# Altium PCB WPU171C.PcbDoc
Units mm, origin at the board's own origin, x right, y up, seen from the top; angles counter-clockwise.
Board outline 32 x 46 mm, 2 copper layers (Top Layer, Bottom Layer); 100 components, 78 nets, 376 pads, 128 vias.
Unrouted connection lines stored in the file: 10.
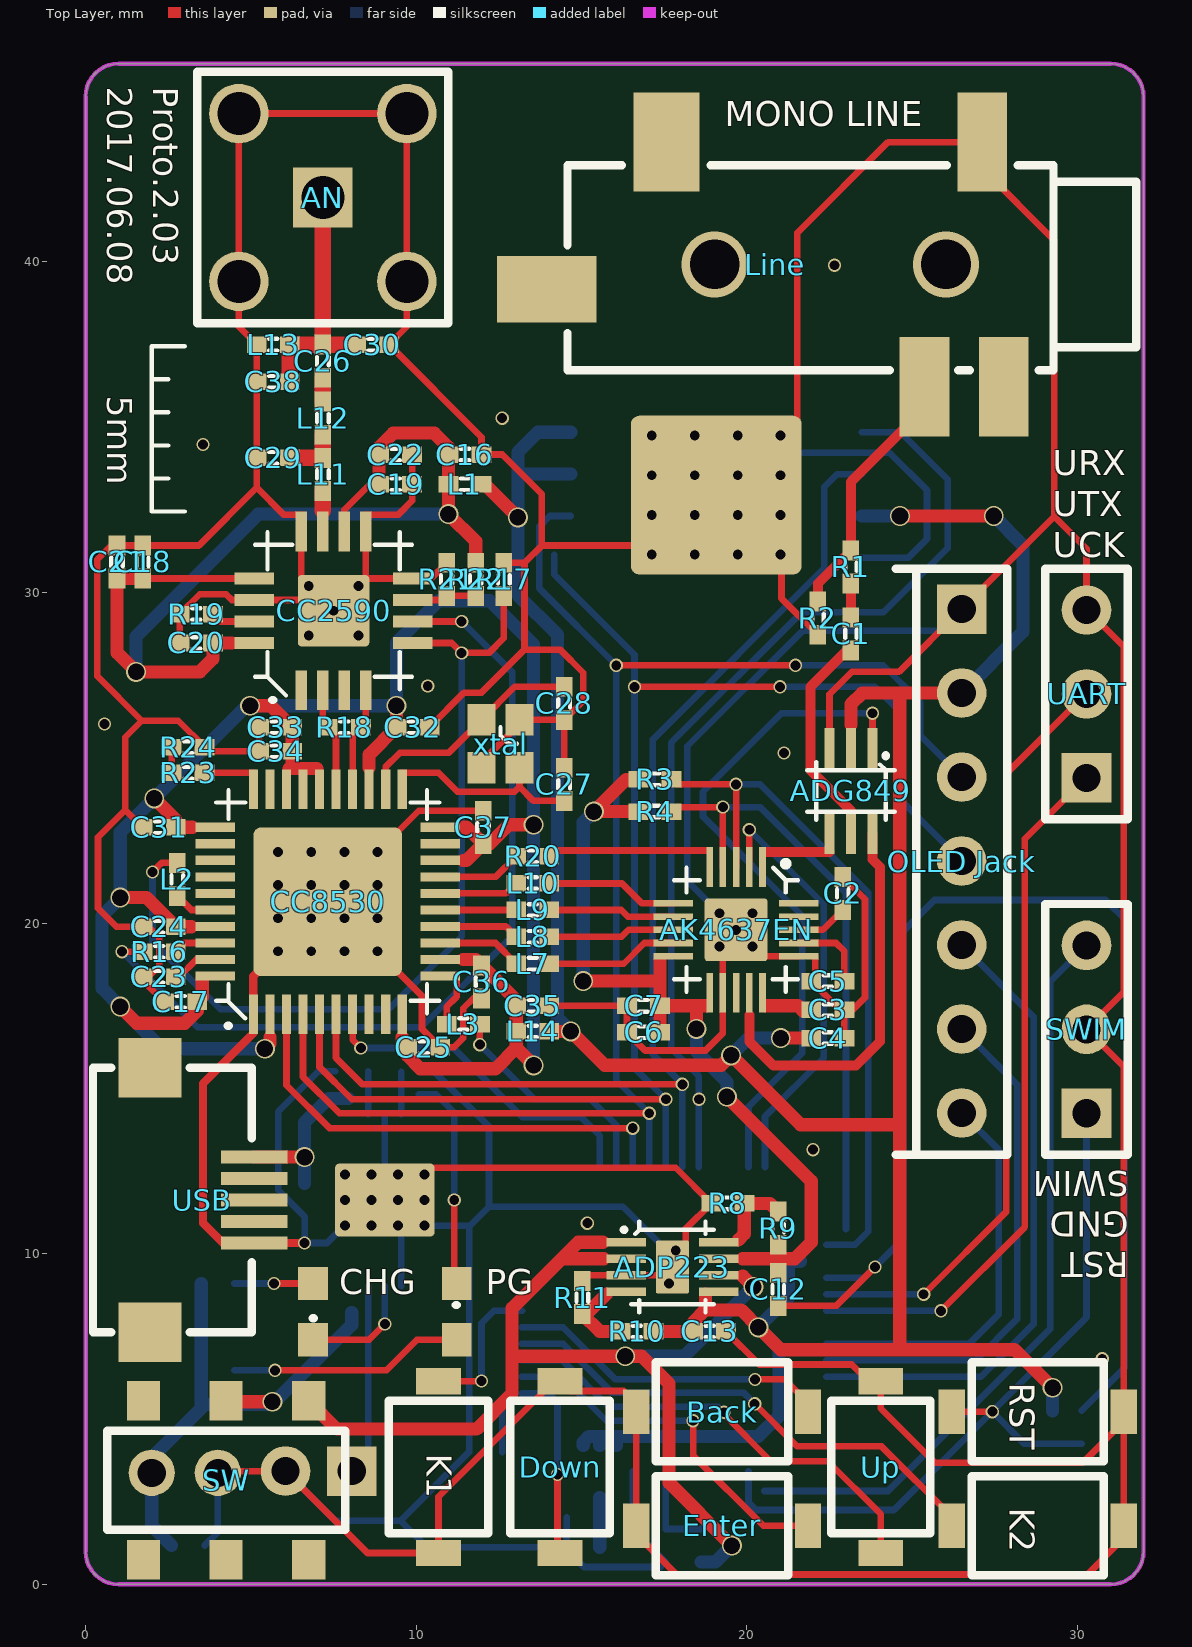
[diagram p0: Top Layer view]
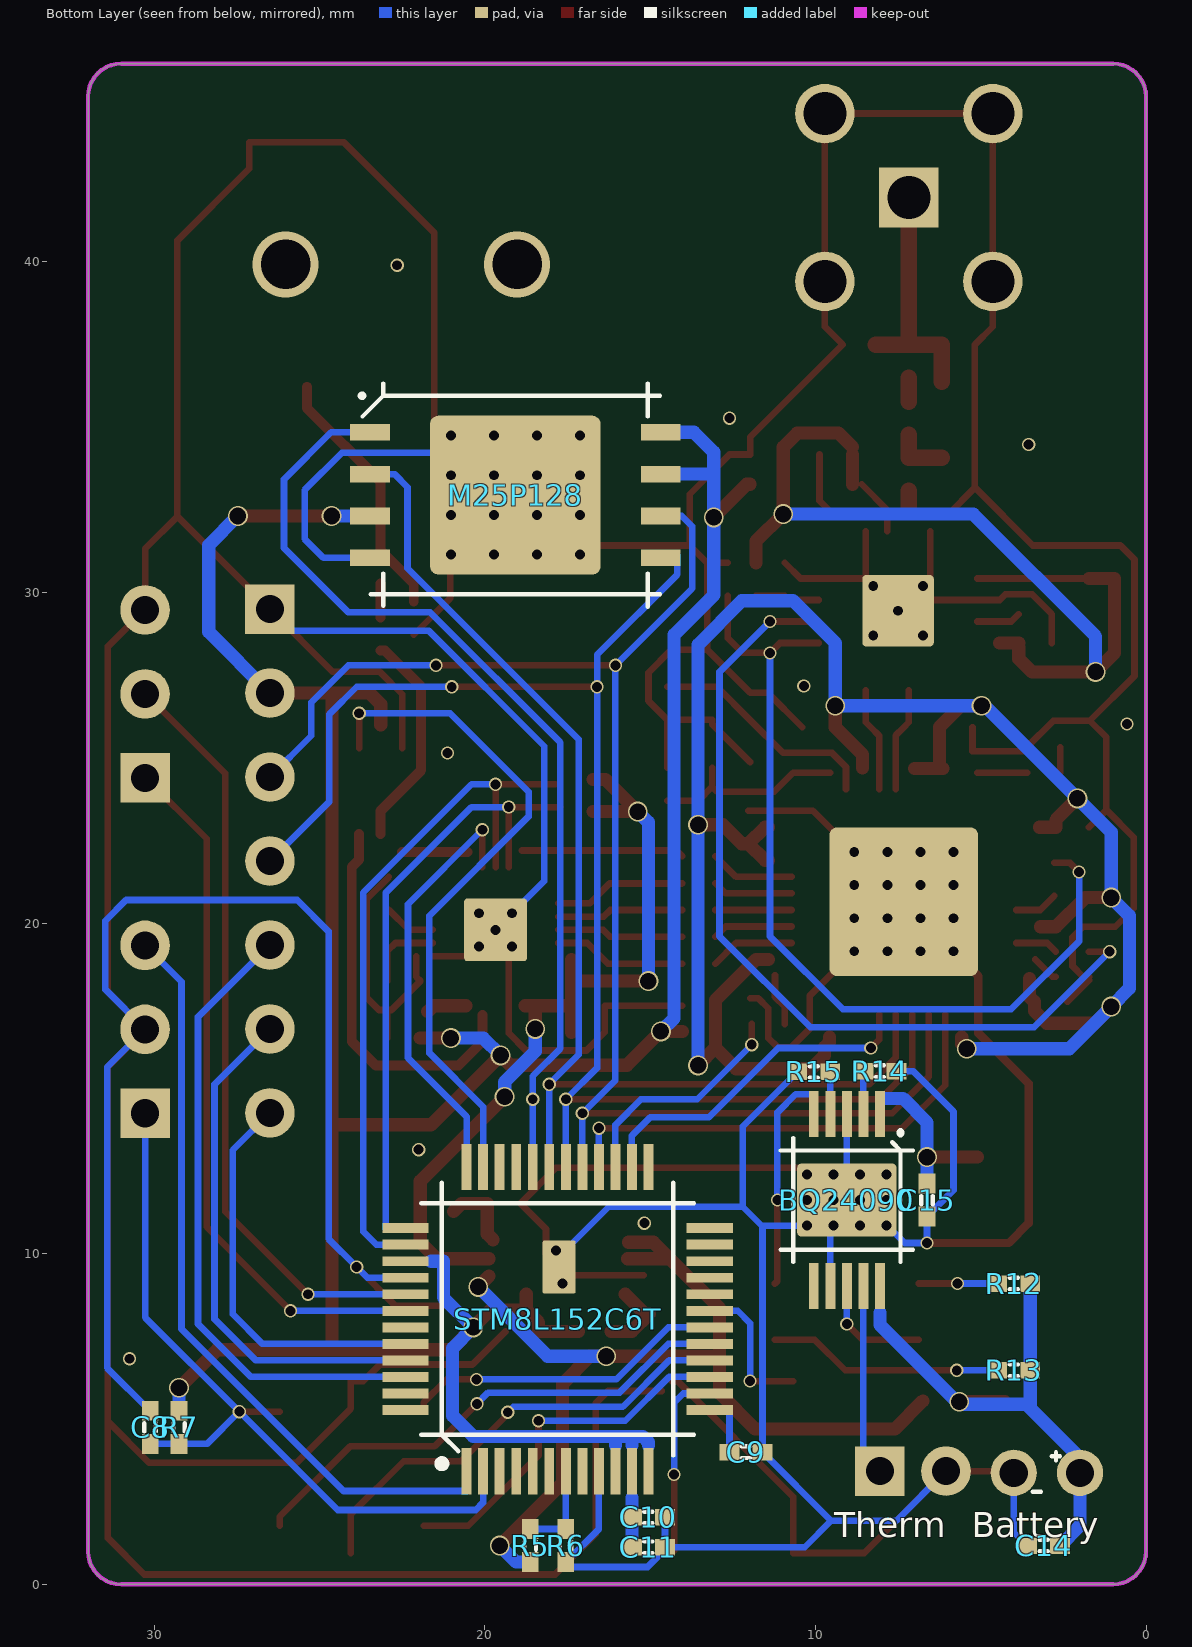
[diagram p1: Bottom Layer view, seen from below]

## Layer stack, top to bottom
Top Solder: solder mask 0.0102, Solder Resist, Dk 3.5
Top Layer: signal copper 0.0356
Dielectric 1: dielectric 0.32, FR-4, Dk 4.8
Bottom Layer: signal copper 0.0356
Bottom Solder: solder mask 0.0102, Solder Resist, Dk 3.5

## Board outline
0,1 ccw(c1,1) 1,0 31,0 ccw(c31,1) 32,1 32,45 ccw(c31,45) 31,46 1,46 ccw(c1,45) 0,45

## Design rules (kind name [scope] priority, off if disabled: settings)
Clearance [All] p1: gap=0.05
ComponentClearance [All] p1: gap=-1 collisioncheckmode=3 verticalgap=0.254 showdistances=FALSE
HoleToHoleClearance [All] p1: gap=0.01 allowstackedmicrovias=TRUE
MinimumSolderMaskSliver [All] p1: minsoldermaskwidth=0.01
PolygonConnect [All] p1: connectstyle=Relief reliefconductorwidth=0.254 reliefentries=4 polygonreliefangle="90 Angle" airgapwidth=0.254
RoutingVias [All] p1: holewidth=0.3 width=0.4 viastyle="Through Hole" minholewidth=0.3 minwidth=0.4 maxholewidth=5 maxwidth=6
SilkToSilkClearance [All] p1: silktosilkclearance=0
SilkToSolderMaskClearance [IsPad] p1: minsilkscreentomaskgap=0 clearancetoexposedcopper=TRUE
SolderMaskExpansion [All] p1: expansion=0.102
Width [All] p1: maxlimit=0.8 minlimit=0.1 preferedwidth=0.2
25 further rules are at their usual default settings.

## Classes and differential pairs
component class Audio: ADG849 AK4637EN C1 C2 C3 C4 C5 C6 C7 Line R1 R2 R3 R4
component class MCU: ADP223 Back Battery BQ24090 C8 C9 C10 C11 C12 C13 C14 C15 CHG Down Enter K1 K2 M25P128 "OLED Jack" PG R5 R6 R7 R8 R9 R10 R11 R12 R13 R14 R15 RST STM8L152C6T SW SWIM Therm UART Up USB
component class RF: AN C16 C17 C18 C19 C20 C21 C22 C23 C24 C25 C26 C27 C28 C29 C30 C31 C32 C33 C34 C35 C36 C37 C38 CC2590 CC8530 L1 L2 L3 L7 L8 L9 L10 L11 L12 L13 L14 R16 R17 R18 R19 R20 R21 R22 R23 R24 X1 xtal

## Components (designator, comment, footprint, x,y, rotation, side; value= is the part's Value field where it differs from the comment)
ADG849 "ADG849" ADG849 23.15,24 r180 top
ADP223 "ADP223" ADP223 17.75,9.6 r270 top
AK4637EN "AK4637EN" AK4637EN 19.675,19.8 r180 top
AN "Antenna SMA" "Antenna SMA-KE" 7.175,41.95 r0 top (schematic designator AN1)
Back "Button" Button_3x4 19.25,5.225 r180 top
Battery "Battery Pack" "Battery Jack small" 3,3.375 r0 bottom
BQ24090 "BQ24090" BQ24090 9.05,11.625 r0 bottom
C1 "Capacity SMD" "SMD 0402_silk" 23.15,28.75 r90 top
C2 "Capacity SMD" "SMD 0402_silk" 22.9,20.9 r90 top
C3 "Capacity SMD" "SMD 0402_silk" 22.45,17.375 r0 top
C4 "Capacity SMD" "SMD 0402_silk" 22.45,16.525 r0 top
C5 "Capacity SMD" "SMD 0402_silk" 22.45,18.25 r180 top
C6 "Capacity SMD" "SMD 0402_silk" 16.875,16.7 r180 top
C7 "Capacity SMD" "SMD 0402_silk" 16.875,17.5 r180 top
C8 "Capacity SMD" "SMD 0402_silk" 30.125,4.75 r270 bottom
C9 "Capacity SMD" "SMD 0402_silk" 12.1,4 r0 bottom
C10 "Capacity SMD" "SMD 0402_silk" 15.05,2.025 r0 bottom
C11 "Capacity SMD" "SMD 0402_silk" 15.05,1.125 r0 bottom
C12 "Capacity SMD" "SMD 0402_silk" 20.95,8.925 r270 top
C13 "Capacity SMD" "SMD 0402_silk" 18.875,7.65 r180 top
C14 "Capacity SMD" "SMD 0402_silk" 3.1,1.175 r180 bottom
C15 "Capacity SMD" "SMD 0402_silk" 6.625,11.625 r90 bottom
C16 "Capacity SMD" "SMD 0402_silk" 11.475,34.175 r180 top
C17 "Capacity SMD" "SMD 0402_silk" 2.875,17.625 r180 top
C18 "Capacity SMD" "SMD 0402_silk" 1.725,30.925 r270 top
C19 "Capacity SMD" "SMD 0402_silk" 9.375,33.275 r180 top
C20 "Capacity SMD" "SMD 0402_silk" 3.35,28.475 r0 top
C21 "Capacity SMD" "SMD 0402_silk" 0.95,30.925 r270 top
C22 "Capacity SMD" "SMD 0402_silk" 9.375,34.175 r180 top
C23 "Capacity SMD" "SMD 0402_silk" 2.225,18.381 r180 top
C24 "Capacity SMD" "SMD 0402_silk" 2.225,19.894 r0 top
C25 "Capacity SMD" "SMD 0402_silk" 10.225,16.25 r180 top
C26 "Capacity SMD" "SMD 0402_silk" 7.175,37 r90 top
C27 "Capacity SMD" "SMD 0402_silk" 14.475,24.2 r270 top
C28 "Capacity SMD" "SMD 0402_silk" 14.475,26.65 r90 top
C29 "Capacity SMD" "SMD 0402_silk" 5.675,34.075 r0 top
C30 "Capacity SMD" "SMD 0402_silk" 8.675,37.5 r180 top
C31 "Capacity SMD" "SMD 0402_silk" 2.225,22.9 r0 top
C32 "Capacity SMD" "SMD 0402_silk" 9.9,25.925 r180 top
C33 "Capacity SMD" "SMD 0402_silk" 5.75,25.925 r0 top
C34 "Capacity SMD" "SMD 0402_silk" 5.75,25.2 r0 top
C35 "Capacity SMD" "SMD 0402_silk" 13.525,17.5 r180 top
C36 "Capacity SMD" "SMD 0402_silk" 11.975,18.225 r90 top
C37 "Capacity SMD" "SMD 0402_silk" 12.025,22.9 r270 top
C38 "Capacity SMD" "SMD 0402_silk" 5.675,36.375 r0 top
CC2590 "CC2590" CC2590 7.5,29.45 r90 top
CC8530 "CC8530" CC8530 7.325,20.65 r90 top
CHG "LED" LED_0603 6.875,8.25 r270 top
Down "Button" Button_3x4 14.35,3.55 r90 top
Enter "Button" Button_3x4 19.25,1.775 r180 top
K1 "Button" Button_3x4 10.675,3.55 r270 top
K2 "Button" Button_3x4 28.8,1.775 r0 top
L1 "Inductor SMD" "SMD 0402_silk" 11.475,33.275 r180 top
L2 "Inductor SMD" "SMD 0402_silk" 2.775,21.325 r90 top
L3 "Inductor SMD" "SMD 0402_silk" 11.425,16.95 r0 top
L7 "Inductor SMD" "SMD 0402_silk" 13.525,18.775 r180 top
L8 "Inductor SMD" "SMD 0402_silk" 13.525,19.587 r180 top
L9 "Inductor SMD" "SMD 0402_silk" 13.525,20.4 r180 top
L10 "Inductor SMD" "SMD 0402_silk" 13.525,21.213 r180 top
L11 "Inductor SMD" "SMD 0402_silk" 7.175,33.575 r270 top
L12 "Inductor SMD" "SMD 0402_silk" 7.175,35.275 r90 top
L13 "Inductor SMD" "SMD 0402_silk" 5.675,37.5 r0 top
L14 "Inductor SMD" "SMD 0402_silk" 13.525,16.725 r180 top
Line "Audio Jack" "Audio Jack PJ-328" 29.275,39.925 r180 top
M25P128 "M25P128" M25P128 19.075,32.95 r180 bottom
"OLED Jack" "OLED Jack" "OLED Jack" 26.5,29.5 r0 top
PG "LED" LED_0603 11.225,8.25 r90 top
R1 "Resistor SMD" "SMD 0402_silk" 23.15,30.775 r90 top
R2 "Resistor SMD" "SMD 0402_silk" 22.15,29.225 r90 top
R3 "Resistor SMD" "SMD 0402_silk" 17.225,24.35 r180 top
R4 "Resistor SMD" "SMD 0402_silk" 17.225,23.375 r180 top
R5 "Resistor SMD" "SMD 0402_silk" 18.625,1.175 r270 bottom
R6 "Resistor SMD" "SMD 0402_silk" 17.55,1.175 r90 bottom
R7 "Resistor SMD" "SMD 0402_silk" 29.25,4.75 r90 bottom
R8 "Resistor SMD" "SMD 0402_silk" 19.425,11.525 r180 top
R9 "Resistor SMD" "SMD 0402_silk" 20.95,10.775 r90 top
R10 "Resistor SMD" "SMD 0402_silk" 16.675,7.65 r0 top
R11 "Resistor SMD" "SMD 0402_silk" 15.025,8.675 r90 top
R12 "Resistor SMD" "SMD 0402_silk" 4,9.1 r180 bottom
R13 "Resistor SMD" "SMD 0402_silk" 4,6.475 r180 bottom
R14 "Resistor SMD" "SMD 0402_silk" 8.05,15.525 r0 bottom
R15 "Resistor SMD" "SMD 0402_silk" 10.05,15.5 r180 bottom
R16 "Resistor SMD" "SMD 0402_silk" 2.225,19.137 r180 top
R17 "Resistor SMD" "SMD 0402_silk" 12.65,30.4 r270 top
R18 "Resistor SMD" "SMD 0402_silk" 7.825,25.925 r180 top
R19 "Resistor SMD" "SMD 0402_silk" 3.35,29.35 r180 top
R20 "Resistor SMD" "SMD 0402_silk" 13.525,22.025 r180 top
R21 "Resistor SMD" "SMD 0402_silk" 10.925,30.4 r270 top
R22 "Resistor SMD" "SMD 0402_silk" 11.8,30.4 r270 top
R23 "Resistor SMD" "SMD 0402_silk" 3.1,24.55 r0 top
R24 "Resistor SMD" "SMD 0402_silk" 3.1,25.325 r180 top
RST "Button" Button_3x4 28.8,5.225 r180 top
STM8L152C6T "STM8L152C6T" "STM LQFP48" 17.8,8.025 r180 bottom (schematic designator STM1)
SW "Switch" "Switch 2P2T" 4.25,3.15 r0 top
SWIM "Header_3x1" HEADER_3x1_2.54 30.275,14.25 r90 top
Therm "Thermistor" Header_2x1_2.00 7.05,3.425 r180 bottom
UART "Header_3x1" HEADER_3x1_2.54 30.275,24.395 r90 top
Up "Button" Button_3x4 24.05,3.55 r90 top
USB "USB Jack Mirco-B" "USB Micro-B" 4.775,11.625 r270 top
xtal "XTAL" xtal_3225_FA-128 12.55,25.425 r90 top

## Footprints (in the part's own frame and the unit in brackets; to place one, negate y for a bottom-side part, rotate by r counter-clockwise, add the part's x,y. Pads: shape width x height; smd on the part's side, far side on the other; paste and mask are expansions set on the pad)
ADG849 [mm]
  rect 0.3x1.2 smd paste+0 mask+0: 1(-0.65,-1.3) 2(0,-1.3) 3(0.65,-1.3) 4(0.65,1.3) 5(0,1.3) 6(-0.65,1.3)
  silkscreen extent -1.33,-1.07 1.33,0.87
ADP223 [mm]
  rect 0.25x1.2 smd mask+0: 1(-0.75,-1.4) 2(-0.25,-1.4) 3(0.25,-1.4) 4(0.75,-1.4) 5(0.75,1.4) 6(0.25,1.4) 7(-0.25,1.4) 8(-0.75,1.4)
  rrect10% 1.6x1 smd mask+0: 3(0,0)
  rrect10% 1.6x1 smd far side mask+0: 3(0,0)
  silkscreen extent -1.38,-1.48 1.38,1.25
AK4637EN [mm]
  rect 0.2x1.2 smd mask+0: 1(-0.8,-1.9) 2(-0.4,-1.9) 3(0,-1.9) 4(0.4,-1.9) 5(0.8,-1.9) 11(0.8,1.9) 12(0.4,1.9) 13(0,1.9) 14(-0.4,1.9) 15(-0.8,1.9)
  rect 1.2x0.2 smd mask+0: 6(1.9,-0.8) 7(1.9,-0.4) 8(1.9,0) 9(1.9,0.4) 10(1.9,0.8) 16(-1.9,0.8) 17(-1.9,0.4) 18(-1.9,0) 19(-1.9,-0.4) 20(-1.9,-0.8)
  rrect10% 1.9x1.9 smd mask+0: 12(0,0)
  rrect10% 1.9x1.9 smd far side mask+0: 12(0,0)
  silkscreen extent -1.88,-2.05 1.88,1.88
"Antenna SMA-KE" [mm]
  rect 1.8x1.8 hole 1.3 paste+0 mask+0: 1(0,0)
  round 1.8 hole 1.3 paste+0 mask+0: 2(-2.54,-2.54) 2(-2.54,2.54) 2(2.54,-2.54) 2(2.54,2.54)
  silkscreen extent -3.8,-3.8 3.8,3.8
"Audio Jack PJ-328" [mm]
  rect 1.5x3 smd mask+0.1: 1(2.15,-3.7) 3(3.9,3.7) 5(1.5,3.7)
  rect 2x3 smd mask+0.1: 2(11.7,-3.7)
  rect 3x2 smd mask+0.1: 4(15.325,0.75)
  silkscreen extent -2.5,-3 14.7,3.2
"Battery Jack small" [mm]
  round 1.4 hole 0.85 paste+0 mask+0: 1(-1,0) 2(1,0)
  silkscreen extent -0.4,-0.63 0.43,0.58
BQ24090 [mm]
  rect 0.3x1.4 smd paste+0 mask+0: 1(-1,-2.6) 2(-0.5,-2.6) 3(0,-2.6) 4(0.5,-2.6) 5(1,-2.6) 6(1,2.6) 7(0.5,2.6) 8(0,2.6) 9(-0.5,2.6) 10(-1,2.6)
  rrect10% 3x2.2 smd far side paste+0 mask+0: 3(0,0)
  rrect10% 3x2.2 smd paste+0 mask+0: 3(0,0)
  silkscreen extent -2,-2.05 2,1.88
Button_3x4 [mm]
  rect 0.8x1.35 smd paste+0 mask+0: 1(-2.6,0) 2(2.6,0)
  silkscreen extent -2,-1.5 2,1.5
CC2590 [mm]
  rect 1.2x0.35 smd paste+0 mask+0: 1(-2.4,0.975) 2(-2.4,0.325) 3(-2.4,-0.325) 4(-2.4,-0.975) 9(2.4,-0.975) 10(2.4,-0.325) 11(2.4,0.325) 12(2.4,0.975)
  rect 0.35x1.2 smd paste+0 mask+0: 5(-0.975,-2.4) 6(-0.325,-2.4) 7(0.325,-2.4) 8(0.975,-2.4) 13(0.975,2.4) 14(0.325,2.4) 15(-0.325,2.4) 16(-0.975,2.4)
  rrect10% 2.16x2.16 smd paste+0 mask+0: 17(0,0)
  rrect10% 2.16x2.16 smd far side paste+0 mask+0: 17(0,0)
  silkscreen extent -2.7,-2.37 2.37,2.37
CC8530 [mm]
  rect 1.2x0.28 smd paste+0 mask+0: 1(-3.4,2.25) 2(-3.4,1.75) 3(-3.4,1.25) 4(-3.4,0.75) 5(-3.4,0.25) 6(-3.4,-0.25) 7(-3.4,-0.75) 8(-3.4,-1.25) 9(-3.4,-1.75) 10(-3.4,-2.25) 21(3.4,-2.25) 22(3.4,-1.75) 23(3.4,-1.25) 24(3.4,-0.75) 25(3.4,-0.25) 26(3.4,0.25) 27(3.4,0.75) 28(3.4,1.25) 29(3.4,1.75) 30(3.4,2.25)
  rect 0.28x1.2 smd paste+0 mask+0: 11(-2.25,-3.4) 12(-1.75,-3.4) 13(-1.25,-3.4) 14(-0.75,-3.4) 15(-0.25,-3.4) 16(0.25,-3.4) 17(0.75,-3.4) 18(1.25,-3.4) 19(1.75,-3.4) 20(2.25,-3.4) 31(2.25,3.4) 32(1.75,3.4) 33(1.25,3.4) 34(0.75,3.4) 35(0.25,3.4) 36(-0.25,3.4) 37(-0.75,3.4) 38(-1.25,3.4) 39(-1.75,3.4) 40(-2.25,3.4)
  rrect10% 4.5x4.5 smd paste+0 mask+0: 41(0,0)
  rrect10% 4.5x4.5 smd far side paste+0 mask+0: 41(0,0)
  silkscreen extent -3.75,-3.37 3.37,3.37
Header_2x1_2.00 [mm]
  rect 1.5x1.5 hole 0.85 paste+0 mask+0: 1(-1,0)
  round 1.5 hole 0.85 paste+0 mask+0: 2(1,0)
HEADER_3x1_2.54 [mm]
  rect 1.5x1.5 hole 0.85 paste+0 mask+0: 1(0,0)
  round 1.5 hole 0.85 paste+0 mask+0: 2(2.54,0) 3(5.08,0)
  silkscreen extent -1.25,-1.25 6.33,1.25
LED_0603 [mm]
  rect 1x0.9 smd paste+0 mask+0: 1(-0.85,0)
  rect 1x0.9 smd mask+0: 2(0.85,0)
  silkscreen extent 0.2,0 0.2,0.03
M25P128 [mm]
  rect 1.2x0.5 smd paste+0 mask+0: 1(-4.4,1.9) 2(-4.4,0.633) 3(-4.4,-0.633) 4(-4.4,-1.9) 5(4.4,-1.9) 6(4.4,-0.633) 7(4.4,0.633) 8(4.4,1.9)
  rrect10% 5.16x4.8 smd far side paste+0 mask+0: 4(0,0)
  rrect10% 5.16x4.8 smd paste+0 mask+0: 4(0,0)
  silkscreen extent -4.65,-3.37 4.38,3.37
"OLED Jack" [mm]
  rect 1.5x1.5 hole 0.85 paste+0 mask+0: 1(0,0)
  round 1.5 hole 0.85 paste+0 mask+0: 2(0,-2.54) 3(0,-5.08) 4(0,-7.62) 5(0,-10.16) 6(0,-12.7) 7(0,-15.24)
  silkscreen extent -2,-16.5 1.38,1.22
"SMD 0402_silk" [mm]
  rect 0.6x0.5 smd paste+0 mask+0: 1(-0.5,0) 2(0.5,0)
  silkscreen extent -0.13,-0.18 0.13,0.18
"STM LQFP48" [mm] "48-Pin LQFP"
  rect 0.3x1.4 smd paste+0 mask+0: 1(-2.75,-4.6) 2(-2.25,-4.6) 3(-1.75,-4.6) 4(-1.25,-4.6) 5(-0.75,-4.6) 6(-0.25,-4.6) 7(0.25,-4.6) 8(0.75,-4.6) 9(1.25,-4.6) 10(1.75,-4.6) 11(2.25,-4.6) 12(2.75,-4.6) 25(2.75,4.6) 26(2.25,4.6) 27(1.75,4.6) 28(1.25,4.6) 29(0.75,4.6) 30(0.25,4.6) 31(-0.25,4.6) 32(-0.75,4.6) 33(-1.25,4.6) 34(-1.75,4.6) 35(-2.25,4.6) 36(-2.75,4.6)
  rect 1.4x0.3 smd paste+0 mask+0: 13(4.6,-2.75) 14(4.6,-2.25) 15(4.6,-1.75) 16(4.6,-1.25) 17(4.6,-0.75) 18(4.6,-0.25) 19(4.6,0.25) 20(4.6,0.75) 21(4.6,1.25) 22(4.6,1.75) 23(4.6,2.25) 24(4.6,2.75) 37(-4.6,2.75) 38(-4.6,2.25) 39(-4.6,1.75) 40(-4.6,1.25) 41(-4.6,0.75) 42(-4.6,0.25) 43(-4.6,-0.25) 44(-4.6,-0.75) 45(-4.6,-1.25) 46(-4.6,-1.75) 47(-4.6,-2.25) 48(-4.6,-2.75)
  silkscreen extent -4.13,-4.47 4.13,4.13
"Switch 2P2T" [mm]
  rect 1x1.2 smd: 1(-2.5,2.4) 3(2.5,2.4) 4(-2.5,-2.4) 5(0,-2.4) 6(2.5,-2.4)
  rect 1x1.2 smd mask+0.1: 2(0,2.4)
  silkscreen extent -3.6,-1.5 3.6,1.5
"USB Micro-B" [mm]
  rect 1.8x1.9 smd paste+0 mask+0: 0(-4,-2.825) 0(4,-2.825)
  rect 0.4x2 smd paste+0 mask+0: 1(-1.3,0.325) 2(-0.65,0.325) 3(0,0.325) 4(0.65,0.325) 5(1.3,0.325)
  silkscreen extent -4,-4.55 4,0.25
xtal_3225_FA-128 [mm]
  rect 0.95x0.85 smd paste+0 mask+0: 1(-0.725,-0.575) 2(0.725,-0.575) 3(0.725,0.575) 4(-0.725,0.575)
  silkscreen extent 0,-0.5 0.5,0

## Part data
Line: library part "Audio Jack PJ-328"
Therm: library part "Thermistor NTC"
USB: library part "USB Jack Micro-B"

## Via types
v1: diameter 0.4, hole 0.3, Top Layer to Bottom Layer, 99 vias
v2: diameter 0.6, hole 0.5, Top Layer to Bottom Layer, 27 vias
v3: diameter 2, hole 1.5, Top Layer to Bottom Layer, 2 vias

## Nets (pads, with @x,y where several pads share a name; then routed paths per layer and width w, separated by ;. In a path a pad name is that pad's centre, name@x,y a point inside that pad or via, vN(x,y) a via of type N, cw(c..) or ccw(c..) an arc to the next point about the centre after c; other vN are vias at no path point)
8530_CSN: CC8530.3 STM8L152C6T.28 | length 14.3
  Top Layer w0.2: CC8530.3 6.075,15.1 7.375,13.8 v1(16.55,13.8)
  Bottom Layer w0.2: STM8L152C6T.28 v1(16.55,13.8)
8530_MISO: CC8530.6 M25P128.2 STM8L152C6T.31 | length 36.5
  Top Layer w0.2: CC8530.6 7.575,15.925 8.375,15.125 v1(18.05,15.125)
  Bottom Layer w0.2: STM8L152C6T.31 v1(18.05,15.125) 18.05,15.133 17.158,16.025 17.158,25.558 22.337,30.737 22.337,33.188 22.733,33.583 M25P128.2
8530_MOSI: "OLED Jack.4" CC8530.5 M25P128.5 STM8L152C6T.30 | length 46
  Top Layer w0.2: CC8530.5 7.075,15.65 8.05,14.675 v1(17.55,14.675) ; v1(16.604,27.15) v1(21,27.15)
  Bottom Layer w0.2: M25P128.5@14.175,31.15 14.175,30.55 16.604,28.121 16.604,15.621 v1(17.55,14.675) STM8L152C6T.30 ; v1(21,27.15) 23.875,27.15 24.7,26.325 24.7,23.68 26.5,21.88
8530_RSTN: L3.2 STM8L152C6T.27 | length 7
  Top Layer w0.2: v1(11.925,16.325) L3.2
  Bottom Layer w0.2: v1(11.925,16.325) 13.575,14.675 15.275,14.675 16.05,13.9 STM8L152C6T.27
8530_SCLK: "OLED Jack.3" CC8530.4 M25P128.6 STM8L152C6T.29 | length 47.1
  Top Layer w0.2: CC8530.4 6.575,15.35 7.675,14.25 v1(17.05,14.25) ; v1(16.05,27.8) v1(21.475,27.8)
  Bottom Layer w0.2: M25P128.6 14.042,32.317 13.725,32 13.725,30.125 v1(16.05,27.8) 16.05,15.25 v1(17.05,14.25) STM8L152C6T.29 ; v1(21.475,27.8) 24.125,27.8 25.25,26.675 25.25,25.67 26.5,24.42
+1.8V: ADP223.7 AK4637EN.10 AK4637EN.11 C6.1 C7.1 C12.1 R3.2 R4.2 R9.1 | length 25.1
  Top Layer w0.4: v2(15.05,18.25) 17.325,18.25 ; R4.2 v2(15.375,23.375) 16.35,24.35 R3.2 ; C6.1 C7.1 ; AK4637EN.10@17.375,18.9 C7.1 ; v2(18.475,16.8) 18.475,17.5 ; AK4637EN.11@18.775,17.5 18.475,17.5 ; v2(19.4,14.75) 21.95,12.2 21.95,10.35 21.45,9.85 19.875,9.85 ; C7.1 18.475,17.5
  Bottom Layer w0.4: v2(15.05,18.25) 15.05,23.05 v2(15.375,23.375) ; v2(18.475,16.8) 18.475,16.125 19.4,15.2 v2(19.4,14.75)
+3.3V: "OLED Jack.2" ADG849.2 ADP223.5 AK4637EN.15 C3.1 C4.1 C10.2 C11.2 C13.2 L1.1 L14.1 M25P128.3 M25P128.7 M25P128.8 R7.2 R10.2 STM8L152C6T.10 STM8L152C6T.11 STM8L152C6T.12 STM8L152C6T.39 | length 102.2
  Top Layer w0.4: L1.1 12.075,33.275 v2(13.075,32.275) ; L14.1 v2(14.675,16.725) 15.7,15.7 19.225,15.7 v2(19.525,16) 21.625,13.9 24.625,13.9 ; R10.2 C13.2 18.375,7.925 18.75,8.3 ; ADP223.5@18.75,8.775 18.75,8.3 ; 20.575,17.5 21.55,17.5 C3.1@21.725,17.325 ; v2(21.025,16.525) C4.1 ; 23.15,26 23.15,26.625 23.485,26.96 24.625,26.96 ; 24.625,7.1 24.625,26.96 ; v2(24.633,32.317) v2(27.467,32.317) ; 26.5,26.96 24.625,26.96 ; v2(29.25,5.95) 28.1,7.1 21.025,7.1 v2(20.35,7.775) 19.825,8.3 18.75,8.3
  Bottom Layer w0.4: 13.092,33.583 M25P128.7 ; v2(14.675,16.725) 14.275,17.125 14.275,28.725 13.075,29.925 v2(13.075,32.275) 13.075,34.25 13.675,34.85 M25P128.8 ; 15.05,4.2 15.05,4.3 15.225,4.475 15.55,4.475 ; C11.2 C10.2 15.55,2.625 ; 15.55,4.2 15.55,4.475 ; 16.05,4.2 16.05,4.475 ; v2(19.525,16) 20.05,16.525 v2(21.025,16.525) ; 21.625,9.775 21.25,9.775 21.25,8.675 v2(20.35,7.775) 20.975,7.15 20.975,5.1 20.35,4.475 16.05,4.475 ; M25P128.3 v2(24.633,32.317) ; 26.5,26.96 28.35,28.81 28.35,31.433 v2(27.467,32.317) ; R7.2 v2(29.25,5.95) ; 15.55,4.475 16.05,4.475
AVDD_CC2590: C16.2 C18.2 C19.2 C20.2 C21.2 C22.2 CC2590.10 CC2590.13 CC2590.16 L1.2 R22.1 | length 31.6
  Top Layer w0.2: C18.2 CC2590.13 ; CC2590.10 7.825,32.5 C19.2@8.6,33.275
  Top Layer w0.4: C18.2 C21.2 0.95,28.175 v2(1.525,27.6) 3.45,27.6 3.85,28 C20.2@3.85,28.35 ; C20.2 4.425,28.475 ; C19.2 C22.2 ; C22.2@8.875,34.4 9.3,34.825 10.55,34.825 10.975,34.4 C16.2 L1.2 v2(10.975,32.375) 11.8,31.55 R22.1
  Bottom Layer w0.4: v2(1.525,27.6) 1.525,28.675 5.225,32.375 v2(10.975,32.375)
GND: "OLED Jack.1" ADG849.3 ADP223.3 AK4637EN.12 AK4637EN.16 AN.2 Back.2 Battery.2 BQ24090.3 BQ24090.7 C2.2 C3.2 C4.2 C5.2 C6.2 C7.2 C8.1 C9.1 C10.1 C11.1 C12.2 C13.1 C14.1 C15.1 C16.1 C17.2 C18.1 C19.1 C20.1 C21.1 C22.1 C23.2 C24.1 C25.1 C27.1 C28.1 C29.1 C30.1 C31.1 C32.1 C33.1 C34.1 C35.1 C36.1 C37.1 C38.1 CC2590.8 CC2590.9 CC2590.12 CC2590.14 CC2590.17 CC8530.1 CC8530.41 Down.2 Enter.2 K1.2 K2.2 L13.1 Line.1 M25P128.4 R2.1 R6.1 R8.2 R11.2 R14.1 R15.1 R17.1 R19.2 R21.1 R24.1 RST.1 STM8L152C6T.9 STM8L152C6T.40 SWIM.2 Therm.2 UART.3 Up.2 USB.5 xtal.2 xtal.4 | length 397.8
  Top Layer w0.2: C23.2@1.725,18.275 C17.2 ; C23.2 1.906,18.381 2.225,18.7 2.225,19.575 1.906,19.894 C24.1 0.931,19.894 0.375,20.45 0.375,22.6 1.2,23.425 ; C31.1 1.2,23.425 ; C20.1 R19.2 3.45,29.95 4.25,29.95 4.425,29.775 CC2590.14 CC2590.17@7.175,29.775 ; R24.1 2.8,26.125 1.7,26.125 ; R24.1@3.725,25.2 C34.1 C33.1 ; Battery.2@4.05,3.425 Therm.2 8.525,0.95 K1.2 10.675,2.65 14.175,6.15 Down.2 ; CC2590.17@6.525,30.425 CC2590.12 ; CC2590.12@6.575,32.35 6,32.35 5.175,33.175 ; CC2590.9@8.45,32.35 9.45,32.35 9.875,32.775 C19.1 C22.1 ; CC2590.9 8.475,30.425 CC2590.8 10.45,30.425 R21.1 ; BQ24090.3@10.025,12.6 17.85,12.6 R8.2 18.15,10.75 ADP223.3@18.15,10 ; C32.1 11.45,26.975 11.975,26.975 13.275,28.275 ; C36.1 11.725,17.725 11.425,17.425 11.425,16.525 11.15,16.25 C25.1 10.175,16.8 10.175,17.8 7.325,20.65 v1(7.825,21.15) 10.075,23.4 C37.1 ; xtal.4@11.975,24.875 13.125,26.025 xtal.2 C28.1 ; R17.1 13.275,30.9 ; C35.1 C7.2 C6.2 16.925,16.15 18.75,16.15 19.275,16.675 19.275,17.9 AK4637EN.12@19.275,19.4 ; C27.1 C28.1 ; Down.2@14.65,5.85 16.275,5.85 16.65,5.475 Back.2 Enter.2 16.65,1.525 17.875,0.3 30.3,0.3 31.4,1.4 K2.2 RST.1@31.4,4.925 ; R11.2@15.2,9.35 16.35,9.35 ADP223.3@17.5,9.35 ; M25P128.4@17.55,31.425 13.8,31.425 ; C13.1 20.375,6.65 23.175,6.65 23.675,6.15 Up.2 24.05,5.325 25.7,3.675 30.15,3.675 RST.1@31.4,4.925 ; AK4637EN.12@20.475,19 AK4637EN.16 ; C12.2 22.7,8.425 v1(23.875,9.6) ; M25P128.4@21.05,30.975 21.05,29.825 R2.1 ; M25P128.4@21.525,34.7 21.525,40.875 24.275,43.625 Line.1 27.125,42.825 29.3,40.65 29.3,32.3 ; AK4637EN.16@22.075,19 22.075,18.375 C5.2 22.825,17.375 C3.2 ; ADG849.3 22.5,26.925 23.175,27.6 24.6,27.6 26.5,29.5 29.3,32.3 ; C2.2 23.575,20.725 23.575,17.75 23.2,17.375 C3.2 ; C4.2 C3.2 ; 1.2,23.425 1.2,25.625 1.7,26.125 ; 1.7,26.125 0.35,27.475 0.35,31 0.775,31.425 C21.1 C18.1 3.425,31.425 5.175,33.175 ; 5.175,33.175 C29.1 C38.1 L13.1 4.635,38.04 4.635,39.41 4.635,44.49 9.715,44.49 9.715,39.41 9.715,38.04 C30.1 11.975,34.7 C16.1 12.6,34.175 13.8,32.975 13.8,31.425 ; 13.275,28.275 14.35,28.275 15.05,27.575 15.05,26.725 C28.1 ; 13.275,28.275 13.275,30.9 ; 13.275,30.9 13.8,31.425 ; 29.3,32.3 30.275,31.325 30.275,29.495 31.4,28.37 31.4,17.915 SWIM.2 31.4,15.665 RST.1 RST.1@31.4,4.925
  Top Layer w0.254: v1(6.625,10.325) USB.5 4.15,10.325 3.55,10.925 3.55,15.15 5.075,16.675 CC8530.1 5.075,18.4 v1(5.825,19.15) v1(6.825,20.15) CC8530.41@7.325,20.65
  Bottom Layer w0.2: C14.1 4,1.575 Battery.2 ; Therm.2 7.55,1.925 9.525,1.925 ; R14.1 7.05,15.525 5.825,14.3 5.825,11.925 C15.1 v1(6.625,10.325) 7.3,10.325 BQ24090.3@8.6,11.625 ; BQ24090.3@9.05,11.625 BQ24090.3@9.05,14.225 ; BQ24090.7 BQ24090.3@9.55,11.125 ; v1(10.25,10.85) 11.625,10.85 ; R15.1 12.2,13.85 12.2,11.425 ; C11.1 10.325,1.125 9.525,1.925 ; C10.1 14.55,1.05 15.075,0.525 R6.1@17.4,0.525 ; STM8L152C6T.9 16.55,1.675 R6.1 ; ADP223.3@17.75,9.925 16.25,11.425 12.2,11.425 ; v1(19.675,19.8) v1(19.175,20.3) 18.2,21.275 18.2,25.35 21.7,28.85 25.85,28.85 26.5,29.5 ; M25P128.4@20.35,34.225 24.325,34.225 25.45,33.1 25.45,31.625 24.875,31.05 M25P128.4@23.475,31.05 ; STM8L152C6T.40 23.55,9.275 v1(23.875,9.6) 24.725,10.45 24.725,19.75 25.675,20.7 30.85,20.7 31.475,20.075 31.475,17.99 SWIM.2 31.425,15.64 31.425,6.55 C8.1 ; 9.525,1.925 C9.1 11.6,10.825 11.625,10.85 ; 11.625,10.85 12.2,11.425
  other v1: 30.75,6.825 17.65,9.1 17.85,10.1 7.85,10.85 8.65,10.85 9.45,10.85 15.175,10.925 7.85,11.625 8.65,11.625 9.45,11.625 10.25,11.625 7.85,12.4 8.65,12.4 9.45,12.4 10.25,12.4 22,13.15 6.825,19.15 7.825,19.15 8.825,19.15 19.175,19.3 20.175,19.3 5.825,20.15 7.825,20.15 8.825,20.15 20.175,20.3 5.825,21.15 6.825,21.15 8.825,21.15 5.825,22.15 6.825,22.15 7.825,22.15 8.825,22.15 21.125,25.15 0.575,26.025 10.35,27.175 6.75,28.7 8.25,28.7 7.5,29.45 6.75,30.2 8.25,30.2 17.125,31.15 18.425,31.15 19.725,31.15 21.025,31.15 17.125,32.35 18.425,32.35 19.725,32.35 21.025,32.35 17.125,33.55 18.425,33.55 19.725,33.55 21.025,33.55 3.55,34.475 17.125,34.75 18.425,34.75 19.725,34.75 21.025,34.75 12.6,35.275 22.65,39.9
IOVDD: C17.1 C24.2 C25.2 C31.2 C32.2 C33.2 C34.2 C35.2 C36.2 C37.2 CC8530.2 CC8530.10 CC8530.12 CC8530.18 CC8530.20 CC8530.23 CC8530.26 CC8530.27 CC8530.28 CC8530.31 CC8530.37 CC8530.40 L14.2 | length 66.5
  Top Layer w0.4: v2(1.05,17.475) 1.55,16.975 3,16.975 3.375,17.35 C17.1 3.525,17.775 CC8530.40@3.525,18.325 ; v2(1.05,20.775) 1.844,20.775 C24.2 3.194,19.894 ; v2(2.075,23.775) 2.725,23.125 C31.2 3.225,22.9 ; v2(4.975,26.575) 5.6,26.575 C33.2 C34.2 6.25,24.775 ; v2(5.425,16.2) 5.575,16.35 5.575,16.55 ; 6.15,24.675 7,24.675 ; 8.575,24.7 8.575,25.1 C32.2 v2(9.4,26.575) ; 9.575,16.55 9.575,16.4 C25.2 9.725,16 10.125,15.6 12.4,15.6 13.025,16.225 ; 11.425,18.9 11.8,18.9 C36.2 13.025,17.675 C35.2 L14.2 13.025,16.225 ; 11.425,21.9 11.525,21.9 C37.2 ; 11.425,22.9 11.525,22.9 C37.2 ; v2(13.55,15.7) 13.025,16.225 ; v2(13.55,22.975) 12.8,22.975 12.225,22.4 C37.2
  Bottom Layer w0.4: v2(5.425,16.2) 2.325,16.2 v2(1.05,17.475) 0.5,18.025 0.5,20.225 v2(1.05,20.775) 1.05,22.75 v2(2.075,23.775) 4.875,26.575 v2(4.975,26.575) v2(9.4,26.575) 9.4,28.475 10.675,29.75 12.225,29.75 13.55,28.425 v2(13.55,22.975) v2(13.55,15.7)
NetADG849_1: ADG849.1 STM8L152C6T.35 | length 20.4
  Top Layer w0.2: ADG849.1 v1(23.8,26.35)
  Bottom Layer w0.2: STM8L152C6T.35 20.05,14.45 21.675,16.075 21.675,20.225 18.675,23.225 18.675,23.975 21.05,26.35 v1(23.8,26.35)
NetADG849_4: ADG849.4 AK4637EN.1 | length 2
  Top Layer w0.3: AK4637EN.1@20.525,22.15 ADG849.4@22.5,22.15
NetADG849_5: ADG849.5 C1.1 | length 6.6
  Top Layer w0.3: ADG849.5 23.15,23.4 21.925,24.625 21.925,27.15 23.025,28.25 C1.1
NetADG849_6: ADG849.6 AK4637EN.14 | length 11.7
  Top Layer w0.3: 20.075,17.225 20.075,16.425 20.8,15.7 23.3,15.7 24.025,16.425 24.025,21.7 23.8,21.925 ADG849.6
NetADP223_4: ADP223.4 R10.1 R11.1 | length 2.3
  Top Layer w0.4: 15.75,8.775 15.15,8.175 R11.1 15.55,7.65 R10.1
NetADP223_8: ADP223.8 R8.1 R9.2 | length 2.3
  Top Layer w0.4: 19.75,10.425 19.925,10.6 R8.1 20.7,11.525 R9.2
NetAK4637EN_2: AK4637EN.2 STM8L152C6T.36 | length 13
  Top Layer w0.2: AK4637EN.2 v1(20.075,22.825)
  Bottom Layer w0.2: v1(20.075,22.825) 22.325,20.575 22.325,15.925 20.55,14.15 STM8L152C6T.36
NetAK4637EN_3: AK4637EN.3 R3.1 STM8L152C6T.38 | length 21.3
  Top Layer w0.2: R3.1@17.875,24.2 v1(19.675,24.2) AK4637EN.3
  Bottom Layer w0.2: v1(19.675,24.2) 20.4,24.2 23.675,20.925 23.675,10.675 23.275,10.275 STM8L152C6T.38
NetAK4637EN_4: AK4637EN.4 R4.1 STM8L152C6T.37 | length 18.2
  Top Layer w0.2: R4.1@17.725,23.512 v1(19.275,23.512) ; AK4637EN.4 v1@19.275,23.425
  Bottom Layer w0.2: v1(19.275,23.512) 20.4,23.512 23,20.912 STM8L152C6T.37@23,10.75
NetAK4637EN_5: AK4637EN.5 R20.1 | length 4.9
  Top Layer w0.2: R20.1 14.2,22.2 AK4637EN.5@18.875,22.2
NetAK4637EN_6: AK4637EN.6 L10.1 | length 4
  Top Layer w0.2: L10.1 14.037,21.2 16.225,21.2 16.825,20.6 AK4637EN.6
NetAK4637EN_7: AK4637EN.7 L9.1 | length 3.8
  Top Layer w0.2: L9.1 16.2,20.4 16.4,20.2 AK4637EN.7
NetAK4637EN_8: AK4637EN.8 L8.1 | length 3.8
  Top Layer w0.2: L8.1 16.212,19.587 16.425,19.8 AK4637EN.8
NetAK4637EN_9: AK4637EN.9 L7.1 | length 4
  Top Layer w0.2: L7.1 16.275,18.775 16.9,19.4 AK4637EN.9
NetAK4637EN_17: AK4637EN.17 C5.1 | length 2.4
  Top Layer w0.2: AK4637EN.17 22.7,19.4 22.95,19.15 C5.1
NetAK4637EN_18: AK4637EN.18 C2.1 | length 1.6
  Top Layer w0.2: AK4637EN.18 22.3,19.8 C2.1
NetAN_1: AN.1 C26.2 C30.2 C38.2 L13.2 | length 7.6
  Top Layer w0.5: C38.2 L13.2 C26.2 ; AN.1 C26.2 ; C30.2 C26.2
NetBattery_1: Battery.1 BQ24090.10 C14.2 R12.2 R13.2 SW.2 | length 16.5
  Top Layer w0.4: SW.2@4.275,5.525 v2(5.65,5.525)
  Bottom Layer w0.4: Battery.1@1.575,3.375 Battery.1 ; C14.2 2,1.775 Battery.1 ; 3.5,5.45 5.65,5.45 8.05,7.85 8.05,8.225 ; R12.2 R13.2 3.5,5.325 2,3.825 Battery.1
NetBQ24090_1: BQ24090.1 C15.2 USB.1 | length 5
  Top Layer w0.4: USB.1 v2(6.625,12.925)
  Bottom Layer w0.4: C15.2 v2(6.625,12.925) 6.625,13.975 7.35,14.7 BQ24090.1@7.95,14.7
NetBQ24090_2: BQ24090.2 R14.2 | length 1.3
  Bottom Layer w0.2: BQ24090.2 R14.2
NetBQ24090_4: BQ24090.4 R15.2 | length 1.3
  Bottom Layer w0.2: BQ24090.4 R15.2
NetBQ24090_5: BQ24090.5 PG.2 | length 6.5
  Top Layer w0.2: v1(11.15,11.625) 11.15,9.175 PG.2
  Bottom Layer w0.2: BQ24090.5@10.075,14.825 10.6,14.825 11.15,14.275 v1(11.15,11.625)
NetBQ24090_8: BQ24090.8 CHG.2 | length 3.5
  Top Layer w0.2: CHG.2 8.575,7.4 v1(9.05,7.875)
  Bottom Layer w0.2: v1(9.05,7.875) BQ24090.8
NetBQ24090_9: BQ24090.9 Therm.1 | length 5.8
  Bottom Layer w0.2: Therm.1 8.55,3.925 BQ24090.9
NetC1_2: C1.2 R1.1 | length 1
  Top Layer w0.3: C1.2 R1.1
NetC9_2: C9.2 STM8L152C6T.13 | length 1.3
  Bottom Layer w0.2: C9.2 STM8L152C6T.13@12.6,5.3
NetC23_1: C23.1 CC8530.39 | length 0.8
  Top Layer w0.2: C23.1 2.831,18.381 CC8530.39@3.35,18.9
NetC26_1: C26.1 L12.2 | length 0.7
  Top Layer w0.5: L12.2 C26.1
NetC27_2: C27.2 CC8530.21 xtal.1 | length 6
  Top Layer w0.2: CC8530.21@9.55,24.55 10.675,24.55 11.25,23.975 12.975,23.975 13.125,24.125 ; xtal.1 13.125,24.125 ; C27.2 13.55,23.7 13.125,24.125
NetC28_2: C28.2 CC8530.22 xtal.3 | length 7.1
  Top Layer w0.2: CC8530.22 9.075,24.725 9.5,25.15 10.975,25.15 xtal.3 12.975,27.15 C28.2
NetC29_2: C29.2 L11.1 L12.1 | length 1.7
  Top Layer w0.5: C29.2 L11.1 L12.1
NetCC2590_2: CC2590.2 CC8530.25 R18.2 | length 3.2
  Top Layer w0.2: CC2590.2 7.175,26.075 R18.2 7.575,25.675 CC8530.25
NetCC2590_4: CC2590.4 CC8530.24 R18.1 | length 3.2
  Top Layer w0.2: CC8530.24 8.075,25.675 R18.1 8.475,26.075 CC2590.4
NetCC2590_5: CC2590.5 L2.2 R17.2 | length 27
  Top Layer w0.2: v1(2.025,21.55) 2.3,21.825 L2.2 ; CC2590.5 11.075,28.475 v1(11.375,28.175) 12.2,28.175 12.65,28.625 R17.2
  Bottom Layer w0.2: v1(2.025,21.55) 2.025,19.45 4.075,17.4 9.175,17.4 11.375,19.6 v1(11.375,28.175)
NetCC2590_6: CC2590.6 R16.2 | length 26.1
  Top Layer w0.2: v1(1.1,19.137) R16.2 ; CC2590.6 v1(11.375,29.125)
  Bottom Layer w0.2: v1(1.1,19.137) 3.387,16.85 10.15,16.85 12.9,19.6 12.9,27.6 v1(11.375,29.125)
NetCC2590_7: CC2590.7 R21.2 R22.2 | length 1.8
  Top Layer w0.2: CC2590.7 R21.2@10.8,29.775 ; R21.2 R22.2
NetCC2590_11: CC2590.11 L11.2 | length 0.6
  Top Layer w0.5: 7.175,32.475 L11.2
NetCC2590_15: CC2590.15 R19.1 | length 1.3
  Top Layer w0.2: R19.1 4.075,29.125 CC2590.15
NetCC8530_7: CC8530.7 STM8L152C6T.26 | length 10.4
  Top Layer w0.2: CC8530.7 8.075,16.475 v1(8.325,16.225)
  Bottom Layer w0.2: v1(8.325,16.225) 11.125,16.225 13.225,14.125 15,14.125 15.55,13.575 STM8L152C6T.26
NetCC8530_11: CC8530.11 L3.1 | length 1.6
  Top Layer w0.2: L3.1 10.925,17.475 11.221,17.771 CC8530.11@11.221,18.425
NetCC8530_13: CC8530.13 L7.2 | length 2.6
  Top Layer w0.2: CC8530.13 12.4,19.4 L7.2
NetCC8530_14: CC8530.14 L8.2 | length 2.4
  Top Layer w0.2: CC8530.14 12.712,19.9 L8.2
NetCC8530_15: CC8530.15 L9.2 | length 2.3
  Top Layer w0.2: CC8530.15 L9.2
NetCC8530_16: CC8530.16 L10.2 | length 2.4
  Top Layer w0.2: CC8530.16 12.712,20.9 L10.2
NetCC8530_17: CC8530.17 R20.2 | length 2.6
  Top Layer w0.2: CC8530.17 12.4,21.4 R20.2
NetCC8530_30: CC8530.30 R23.2 | length 1.5
  Top Layer w0.2: R23.2 CC8530.30@5.1,24.55
NetCC8530_36: CC8530.36 L2.1 | length 1.3
  Top Layer w0.2: L2.1 3.2,20.4 CC8530.36
NetCC8530_38: CC8530.38 R16.1 | length 1.3
  Top Layer w0.2: R16.1 2.987,19.4 CC8530.38
NetCHG_1: CHG.1 R12.1 | length 2.4
  Top Layer w0.2: v1(5.7,9.1) CHG.1
  Bottom Layer w0.2: R12.1 v1(5.7,9.1)
NetLine_3: Line.3 R1.2 R2.2 | length 7.8
  Top Layer w0.3: R2.2 22.15,30.275 R1.2 23.15,33.35 25.375,35.575 Line.3
NetPG_1: PG.1 R13.1 | length 7.1
  Top Layer w0.2: v1(5.725,6.475) 9.1,6.475 10.025,7.4 PG.1
  Bottom Layer w0.2: R13.1 v1(5.725,6.475)
NetR5_1: R5.1 R6.2 STM8L152C6T.7 | length 2.8
  Bottom Layer w0.2: STM8L152C6T.7 R6.2 R5.1
NetR23_1: R23.1 R24.2 | length 0.8
  Top Layer w0.2: R23.1 R24.2
SPI_OLED_SCN: "OLED Jack.7" STM8L152C6T.44 | length 12.1
  Bottom Layer w0.2: STM8L152C6T.44 26.725,7.275 27.625,8.175 27.625,13.135 26.5,14.26
STM8_KEY_1: K1.1 STM8L152C6T.19 | length 4.4
  Top Layer w0.2: K1.1 v1(11.975,6.15)
  Bottom Layer w0.2: v1(11.975,6.15) 11.975,7.9 12.35,8.275 STM8L152C6T.19
STM8_KEY_2: K2.1 STM8L152C6T.17 | length 15.4
  Top Layer w0.2: v1(20.237,5.462) 21.525,4.175 24.075,4.175 26.2,2.05 K2.1
  Bottom Layer w0.2: STM8L152C6T.17 14.45,7.275 15.925,5.8 19.9,5.8 v1(20.237,5.462)
STM8_KEY_BACK: Back.1 STM8L152C6T.18 | length 9.9
  Top Layer w0.2: v1(20.25,6.2) 21.15,6.2 21.85,5.5 Back.1
  Bottom Layer w0.2: STM8L152C6T.18 14.45,7.775 16.025,6.2 v1(20.25,6.2)
STM8_KEY_DOWN: Down.1 STM8L152C6T.14 | length 5.7
  Top Layer w0.2: Down.1@14.275,1.025 v1(14.275,3.325)
  Bottom Layer w0.2: STM8L152C6T.14 14,5.775 14.275,5.5 v1(14.275,3.325)
STM8_KEY_ENTER: Enter.1 STM8L152C6T.15 | length 11.1
  Top Layer w0.2: v1(18.375,4.95) 18.375,3.9 20.5,1.775 Enter.1
  Bottom Layer w0.2: STM8L152C6T.15 14.425,6.275 15.75,4.95 v1(18.375,4.95)
STM8_KEY_UP: STM8L152C6T.16 Up.1 | length 14
  Top Layer w0.2: v1(19.306,5.206) 19.306,5.144 20.725,3.725 22.45,3.725 24.05,2.125 Up.1
  Bottom Layer w0.2: STM8L152C6T.16 14.425,6.775 15.825,5.375 19.137,5.375 v1(19.306,5.206)
STM8_M25P_SCN: M25P128.1 STM8L152C6T.32 | length 29.3
  Bottom Layer w0.2: STM8L152C6T.32 v1(18.55,14.675) 18.55,15.375 17.712,16.213 17.712,25.462 21.65,29.4 24.125,29.4 26.075,31.35 26.075,33.425 24.65,34.85 M25P128.1
STM8_OLED_D/C: "OLED Jack.6" STM8L152C6T.45 | length 15.8
  Bottom Layer w0.2: STM8L152C6T.45 26.925,6.775 28.175,8.025 28.175,15.125 26.5,16.8
STM8_OLED_RST: "OLED Jack.5" STM8L152C6T.46 | length 19.3
  Bottom Layer w0.2: STM8L152C6T.46 27.075,6.275 28.675,7.875 28.675,17.165 26.5,19.34
STM8_RST: C8.2 R7.1 RST.2 STM8L152C6T.2 SWIM.1 | length 24.2
  Top Layer w0.2: RST.2 v1(27.425,5.225)
  Bottom Layer w0.2: STM8L152C6T.2 20.05,2.475 20.275,2.25 24.45,2.25 v1(27.425,5.225) ; C8.2 R7.1 28.4,4.25 v1(27.425,5.225) ; SWIM.1 30.275,8.075 v1(27.425,5.225)
STM8_SWIM: STM8L152C6T.1 SWIM.3 | length 22.7
  Bottom Layer w0.2: STM8L152C6T.1@20.525,2.825 24.275,2.825 29.175,7.725 29.175,18.23 SWIM.3
"SYSTEM LOAD": ADP223.1 ADP223.2 ADP223.6 R5.2 SW.3 | length 31.4
  Top Layer w0.4: SW.3 7.6,4.7 11.825,4.7 12.9,5.775 12.9,6.9 v2(16.325,6.9) 16.825,6.9 17.65,6.075 17.65,3.075 v2(19.55,1.175) ; 12.9,6.975 12.9,8.35 14.4,9.85 ; 15.65,10.35 14.9,10.35 14.4,9.85 ; 15.675,9.85 14.4,9.85 ; 19.875,9.325 v2(20.2,9)
  Bottom Layer w0.4: v2(16.325,6.9) 18.1,6.9 v2(20.2,9) ; R5.2 19.05,0.675 v2(19.55,1.175)
USART_RX: STM8L152C6T.41 UART.2 | length 23.2
  Top Layer w0.2: v1(25.35,8.775) 27.85,11.275 27.85,24.53 UART.2@30.275,26.955
  Bottom Layer w0.2: STM8L152C6T.41 v1(25.35,8.775)
USART_TX: STM8L152C6T.42 UART.1 | length 21.4
  Top Layer w0.2: v1(25.875,8.275) 28.412,10.812 28.412,22.552 UART.1@30.275,24.415
  Bottom Layer w0.2: STM8L152C6T.42 v1(25.875,8.275)
pads on no net: AK4637EN.13 AK4637EN.19 AK4637EN.20 BQ24090.6 CC2590.1 CC2590.3 CC8530.8 CC8530.9 CC8530.19 CC8530.29 CC8530.32 CC8530.33 CC8530.34 CC8530.35 Line.2 Line.4 Line.5 STM8L152C6T.3 STM8L152C6T.4 STM8L152C6T.5 STM8L152C6T.6 STM8L152C6T.8 STM8L152C6T.20 STM8L152C6T.21 STM8L152C6T.22 STM8L152C6T.23 STM8L152C6T.24 STM8L152C6T.25 STM8L152C6T.33 STM8L152C6T.34 STM8L152C6T.43 STM8L152C6T.47 STM8L152C6T.48 SW.1 SW.4 SW.5 SW.6 USB.0 USB.2 USB.3 USB.4
copper on no net:
  other v3: 19.025,39.925 26.025,39.925

## Keep-outs
Keep-Out Layer:
  the board outline again, w0.13

## Other copper
Top Layer:
  pour cut-out: 5.7,28.3 6.35,27.65 8.65,27.65 9.3,28.3 9.3,30.6 8.65,31.25 6.35,31.25 5.7,30.6
  pour cut-out: 16.95,8.725 16.95,10.475 17.25,10.4 18.25,10.4 18.55,10.475 18.55,8.725 18.25,8.8 17.25,8.8
  pour cut-out: 4.525,18.26 4.935,17.85 9.715,17.85 10.125,18.26 10.125,23.04 9.715,23.45 4.935,23.45 4.525,23.04
  pour cut-out: 18.775,18.5 18.375,18.9 18.375,20.7 18.775,21.1 20.575,21.1 20.975,20.7 20.975,18.9 20.575,18.5
Bottom Layer:
  pour cut-out: 14.075,30.8 16.495,30.55 21.655,30.55 24.075,30.8 24.075,35.1 21.655,35.35 16.495,35.35 14.075,35.1
  pour cut-out: 7.9,13.525 7.55,12.725 7.55,10.525 7.9,9.725 10.2,9.725 10.55,10.525 10.55,12.725 10.2,13.525

## Silkscreen, mask and mechanical layers (free items; w line width, h text height)
Top Overlay:
  lines w0.13: 2,33.45 2.5,33.45 ; 2,34.45 2.5,34.45 ; 2,35.45 2.5,35.45 ; 2,36.45 2.5,36.45 ; 3,32.45 2,32.45 2,37.45 3,37.45
  text "2017.06.08" at 0.65,45.3 h0.76 r270
  text "Proto.2.03" at 2.05,45.3 h0.76 r270
  text "MONO LINE" at 19.325,44.1 h0.76
  text "5mm" at 0.65,35.95 h0.76 r270
  text "URX" at 29.25,33.542 h0.76
  text "UTX" at 29.25,32.308 h0.76
  text "UCK" at 29.25,31.075 h0.76
  text "SWIM" at 31.55,12.5 h0.76 r180
  text "GND" at 31.55,11.275 h0.76 r180
  text "RST" at 31.55,10.05 h0.76 r180